# Altium PCB LPCB282R0.PcbDoc
Units mm, origin at the board's own origin, x right, y up, seen from the top; angles counter-clockwise.
Board outline 96 x 109 mm, 2 copper layers (Top Layer, Bottom Layer); 27 components, 11 nets, 50 pads, 6 vias.
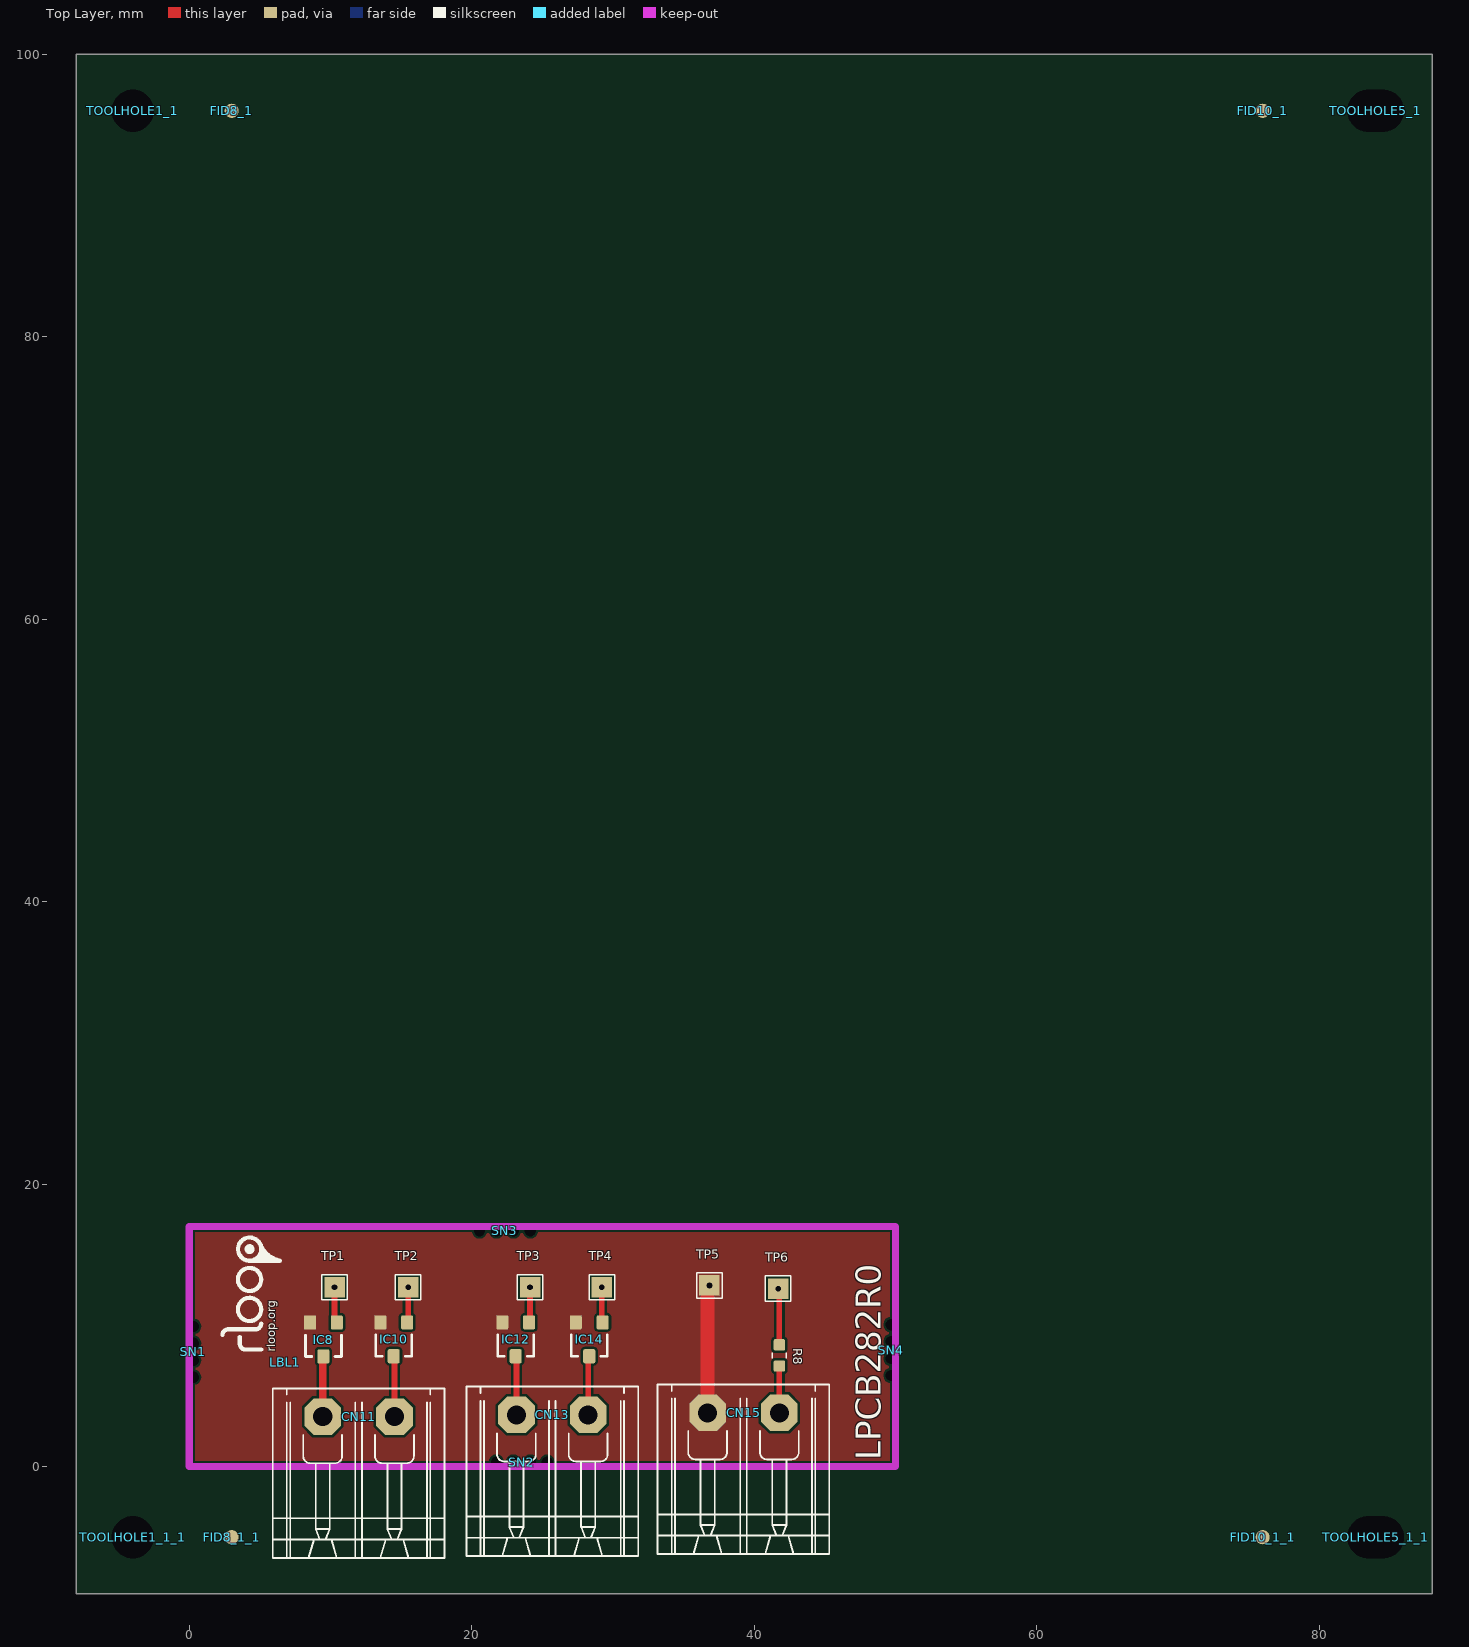
[diagram p0: Top Layer view]
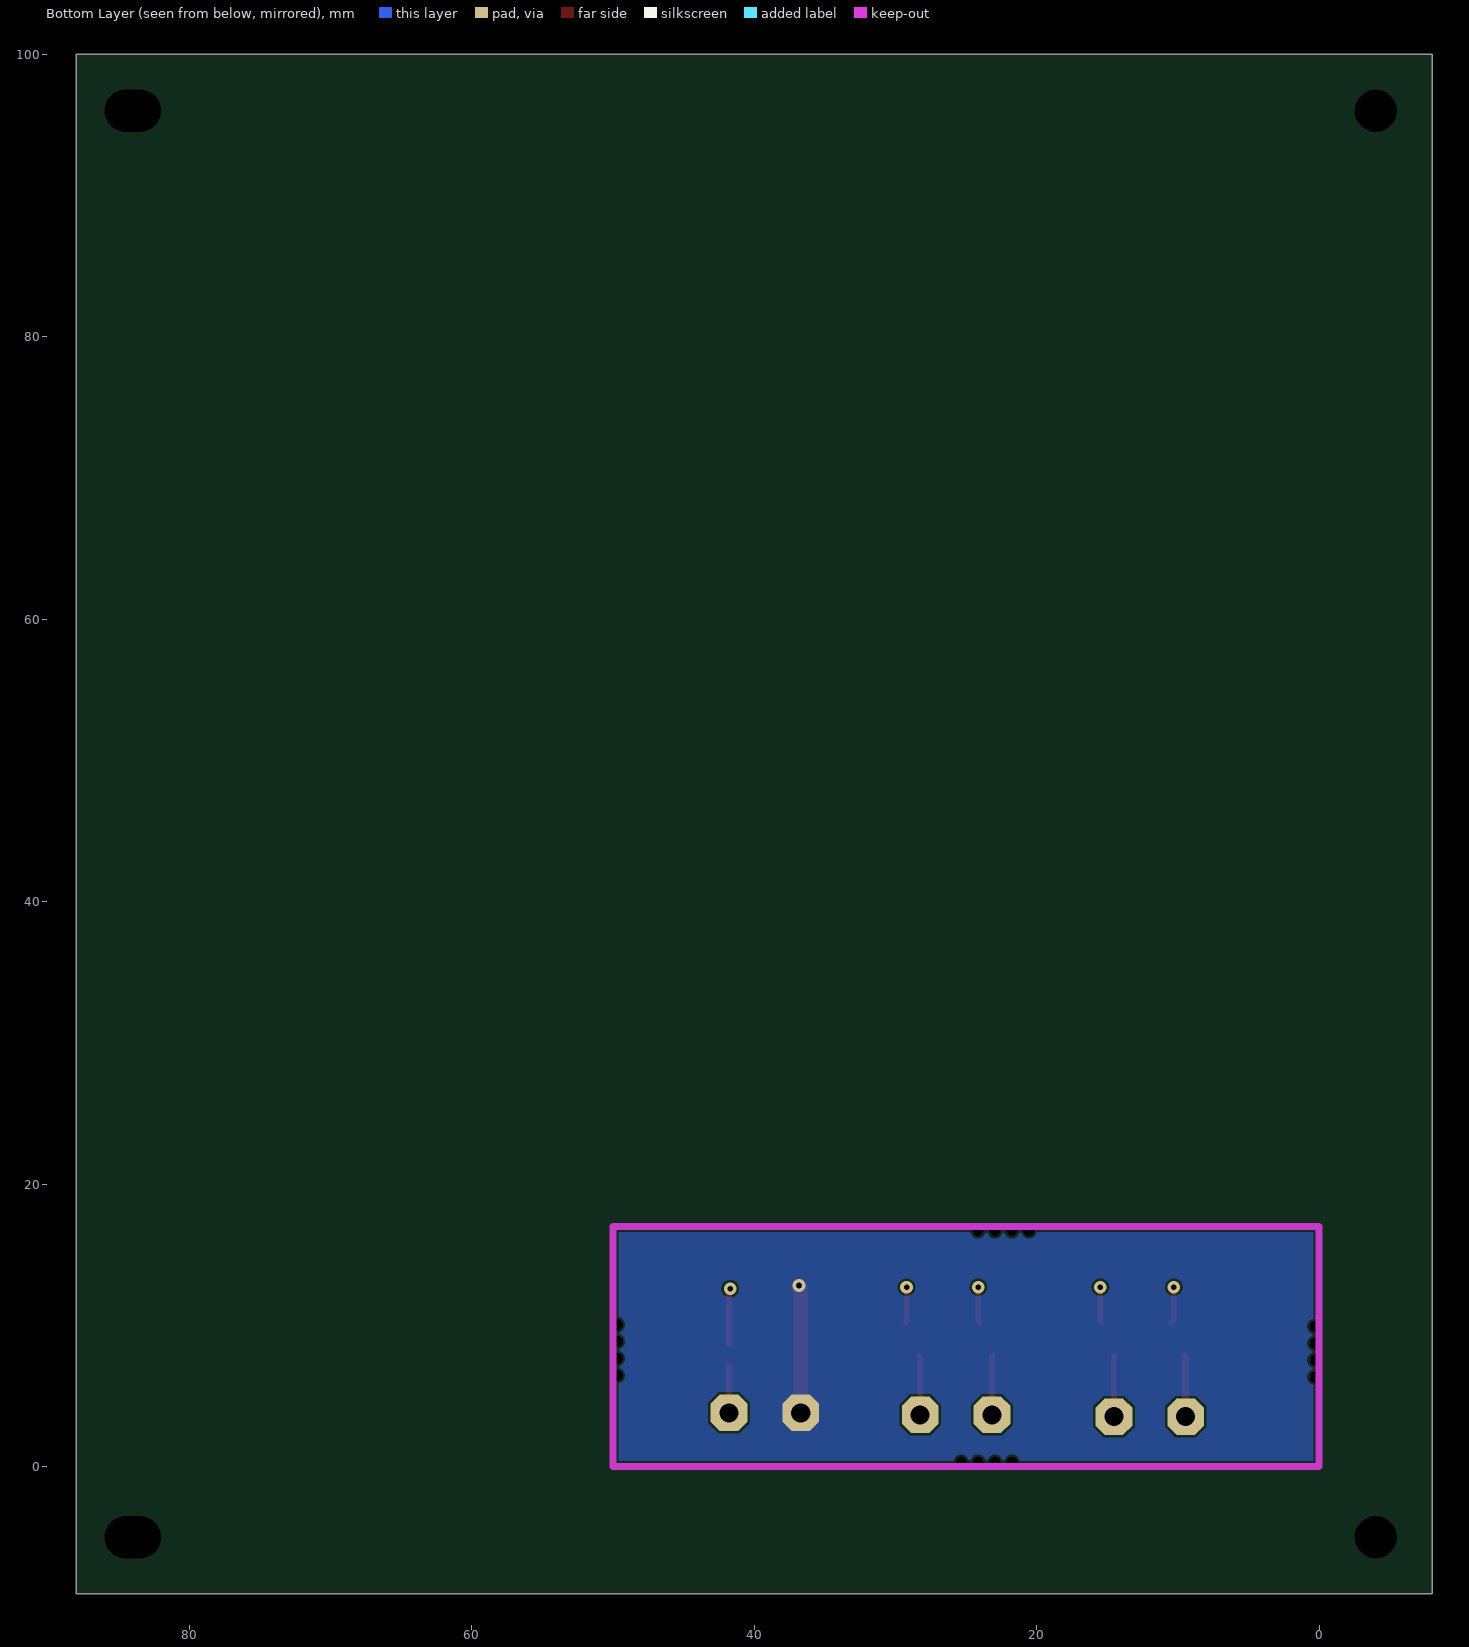
[diagram p1: Bottom Layer view, seen from below]

## Layer stack, top to bottom
Top Layer: signal copper 0.0356
Dielectric: dielectric 0.32, FR-4, Dk 4.8
Bottom Layer: signal copper 0.0356

## Board outline
-8,-9 -8,100 88,100 88,-9

## Design rules (kind name [scope] priority, off if disabled: settings)
Clearance [All] p1: gap=0.16
Height [All] p1 off: minheight=0 maxheight=25.4 prefheight=12.7
HoleSize [All] p1: absolutevalues=TRUE maxlimit=6 minlimit=0.025 maxpercent=80.000 minpercent=20.000
MinimumSolderMaskSliver [All] p1 off: minsoldermaskwidth=0.1
PlaneConnect PlaneConnect_1 [IsVia] p1: planeconnectstyle=Direct reliefexpansion=0.508 reliefentries=4 reliefconductorwidth=0.254 reliefairgap=0.254
PlaneConnect [All] p2: planeconnectstyle=Relief reliefexpansion=0.508 reliefentries=4 reliefconductorwidth=0.254 reliefairgap=0.254
PolygonConnect [IsVia] p1: connectstyle=Direct reliefconductorwidth=0.254 reliefentries=4 polygonreliefangle="90 Angle" airgapwidth=0.254
PolygonConnect PolygonConnect_1 [All] p2: connectstyle=Direct reliefconductorwidth=0.254 reliefentries=4 polygonreliefangle="90 Angle" airgapwidth=0.254
RoomDefinition "LPCB282 - TOP" [InComponentClass('LPCB282 - TOP')] p1: confinementstyle=ConfineIn formatcopy=TRUE lockcomponents=FALSE outline 169.165,61.386 336.932,61.386 336.932,80.69 169.165,80.69
RoutingVias [All] p1: holewidth=0.6 width=1.2 viastyle="Through Hole" minholewidth=0.3 minwidth=0.6 maxholewidth=1 maxwidth=2
SilkToSilkClearance [All] p1 off: silktosilkclearance=0.1
SilkToSolderMaskClearance [IsPad] p1 off: minsilkscreentomaskgap=0.1 clearancetoexposedcopper=TRUE
SolderMaskExpansion [All] p1: expansion=0.102
Width [All] p1: maxlimit=1 minlimit=0.16 preferedwidth=0.2
22 further rules are at their usual default settings.

## Classes and differential pairs
component class "LPCB282 - TOP": CN11 CN13 CN15 IC8 IC10 IC12 IC14 LBL1 R8 SN1 SN2 SN3 SN4 TP1 TP2 TP3 TP4 TP5 TP6

## Components (designator, comment, footprint, x,y, rotation, side; value= is the part's Value field where it differs from the comment)
CN11 "691 313 510 002" "691 313 510 002" 9.451,3.537 r0 top
CN13 "691 313 510 002" "691 313 510 002" 23.167,3.664 r0 top
CN15 "691 313 510 002" "691 313 510 002" 36.703,3.81 r0 top
FID8_1 "FIDUCIAL" LFP113__FIDUCIAL 3,96 r0 top
FID8_1_1 "FIDUCIAL" LFP113__FIDUCIAL 3,-5 r0 top
FID10_1 "FIDUCIAL" LFP113__FIDUCIAL 76,96 r0 top
FID10_1_1 "FIDUCIAL" LFP113__FIDUCIAL 76,-5 r0 top
IC8 "NUD3124LT1G" LFP021__SOT23 9.5,9 r180 top
IC10 "NUD3124LT1G" LFP021__SOT23 14.478,9.017 r180 top
IC12 "NUD3124LT1G" LFP021__SOT23 23.114,9.017 r180 top
IC14 "NUD3124LT1G" LFP021__SOT23 28.321,9.017 r180 top
LBL1 "RLOOP_LOGO" RLOOP_LOGO 6.8,7.4 r90 top
R8 "0R / 0.1W / SMD 0603" LFP020__CR1608-0603-IPC7351_B 41.783,7.874 r90 top
SN1 "PCB_SNAPOUT_0.3MM" PCB_SNAPOUT_0.3MM 0,8.128 r270 top
SN2 "PCB_SNAPOUT_0.3MM" PCB_SNAPOUT_0.3MM 23.548,0 r0 top
SN3 "PCB_SNAPOUT_0.3MM" PCB_SNAPOUT_0.3MM 22.352,17 r180 top
SN4 "PCB_SNAPOUT_0.3MM" PCB_SNAPOUT_0.3MM 50,8.255 r90 top
TOOLHOLE1_1 "Comment" TOOL-1#1 -4,96 r0 top
TOOLHOLE1_1_1 "Comment" TOOL-1#1 -4,-5 r0 top
TOOLHOLE5_1 "Comment" TOOL-1#2 84,96 r0 top
TOOLHOLE5_1_1 "Comment" TOOL-1#2 84,-5 r0 top
TP1 "SMD_TP_VIA" SMD-TP-VIA 10.287,12.7 r90 top
TP2 "SMD_TP_VIA" SMD-TP-VIA 15.494,12.7 r90 top
TP3 "SMD_TP_VIA" SMD-TP-VIA 24.13,12.7 r90 top
TP4 "SMD_TP_VIA" SMD-TP-VIA 29.21,12.7 r90 top
TP5 "SMD_TP_VIA" SMD-TP-VIA 36.83,12.827 r90 top
TP6 "SMD_TP_VIA" SMD-TP-VIA 41.7,12.6 r90 top

## Footprints (in the part's own frame and the unit in brackets; to place one, negate y for a bottom-side part, rotate by r counter-clockwise, add the part's x,y. Pads: shape width x height; smd on the part's side, far side on the other; paste and mask are expansions set on the pad)
"691 313 510 002" [mm] "Connector, Pluggable Terminal Block, 5.08mm, 2 Way, PTH"
  oct 2.6x2.6 hole 1.35: 1(0,0) 2(5.08,0)
  silkscreen extent -3.54,-10 8.62,2
LFP020__CR1608-0603-IPC7351_B [mm]
  rrect25% 0.8x0.8 smd: 1(-0.75,0) 2(0.75,0)
  silkscreen extent -0.2,-0.5 0.2,0.5
LFP021__SOT23 [mm] "SOT-23; 3 Leads; Body 3.0 x 2.5 mm, inc. leads (LxW max)"
  rrect25% 0.85x1 smd paste-0.05: 1(-0.95,-1.2) 2(0.95,-1.2) 3(0,1.2)
  silkscreen extent -1.27,-0.3 1.28,1.2
LFP113__FIDUCIAL [mm]
  round 1 smd paste-2 mask+1.5: 0(0,0)
PCB_SNAPOUT_0.3MM [mm]
  round 0.4 hole 0.8 unplated: 0(-1.8,0.3) 0(-0.6,0.3) 0(0.6,0.3) 0(1.8,0.3)
RLOOP_LOGO [mm]
  silkscreen extent 0.89,0.39 8.82,4.45
SMD-TP-VIA [mm]
  rect 1.45x1.45 smd paste-2: 1(0,0)
  silkscreen extent -0.9,-0.9 0.9,0.9
TOOL-1#1 [mm]
  round 2.54 hole 3 unplated: TOOL(0,0)
TOOL-1#2 [mm]
  round 0.076 hole 3 slot 4 at 0 deg unplated: TOOL1(0,0)

## Part data
CN11 CN13 CN15: "Connector, Pluggable Terminal Block, 5.08mm, 2 Way, PTH"
IC8 IC10 IC12 IC14: "IC, Relay Driver, 28V Industrial, SMD SOT23 [LIC292]"
R8: "Resistor, Ceramic Chip, 0R, 0.1W, SMD 0603 [LRE026]"
SN1 SN2 SN3 SN4: "PCB Snapout + 0.3mm"
TP1 TP2 TP3 TP4 TP5 TP6: "SMD Test Point With VIA"

## Via types
v1: diameter 0.9, hole 0.4, Top Layer to Bottom Layer, tented bottom, 6 vias

## Nets (pads, with @x,y where several pads share a name; then routed paths per layer and width w, separated by ;. In a path a pad name is that pad's centre, name@x,y a point inside that pad or via, vN(x,y) a via of type N, cw(c..) or ccw(c..) an arc to the next point about the centre after c; other vN are vias at no path point)
DGND: CN15.1 IC8.2 IC10.2 IC12.2 IC14.2 TP5.1 | length 9.1
  Top Layer w1: CN15.1 36.703,12.7 v1(36.83,12.827)
NetCN11_1: CN11.1 IC8.3 | length 4.3
  Top Layer w0.5: CN11.1 9.451,7.751 IC8.3
NetCN11_2: CN11.2 IC10.3 | length 4.3
  Top Layer w0.4: IC10.3 14.531,7.764 CN11.2
NetCN13_1: CN13.1 IC12.3 | length 4.2
  Top Layer w0.4: IC12.3 23.167,7.764 CN13.1
NetCN13_2: CN13.2 IC14.3 | length 4.2
  Top Layer w0.4: CN13.2 28.247,7.743 IC14.3
NetCN15_2: CN15.2 R8.1 | length 3.3
  Top Layer w0.4: CN15.2 R8.1
NetIC8_1: IC8.1 TP1.1 | length 2.6
  Top Layer w0.4: v1(10.287,12.7) 10.287,10.363 IC8.1
NetIC10_1: IC10.1 TP2.1 | length 2.5
  Top Layer w0.4: IC10.1 15.494,10.283 v1(15.494,12.7)
NetIC12_1: IC12.1 TP3.1 | length 2.5
  Top Layer w0.4: IC12.1 24.13,10.283 v1(24.13,12.7)
NetIC14_1: IC14.1 TP4.1 | length 2.5
  Top Layer w0.4: v1(29.21,12.7) 29.21,10.278 IC14.1
P24V: R8.2 TP6.1 | length 4
  Top Layer w0.4: v1(41.7,12.6) 41.783,12.517 R8.2
pads on no net: FID8_1.0 FID8_1_1.0 FID10_1.0 FID10_1_1.0 SN1.0 SN2.0 SN3.0 SN4.0 TOOLHOLE1_1.TOOL TOOLHOLE1_1_1.TOOL TOOLHOLE5_1.TOOL1 TOOLHOLE5_1_1.TOOL1

## Polygon pours and split planes (outlines as drawn)
DGND on Top Layer "Bottom Layer-No Net" (solid, remove dead copper, pour order 4): 0,0 0,17 50,17 50,0.2
DGND on Bottom Layer "Bottom Layer-No Net" (solid, remove dead copper, pour order 3): 0,0.1 0,17.1 50,17.1 50,0.3

## Keep-outs
Keep-Out Layer:
  lines w0.5: 0,0 50,0 50,17 0,17 0,0

## Silkscreen, mask and mechanical layers (free items; w line width, h text height)
Top Overlay:
  text "LPCB282R0" at 49.559,0.451 h3 r90
Top Paste:
  lines w1: -22.647,-15.577 177.353,-15.577 177.353,197.423 -22.647,197.423 -22.647,-15.577
Mechanical 1:
  lines w0.1: -8,-9 -8,100 88,100 88,-9 -8,-9
  lines w0.127: 0,0 0,17 50,17 50,0 0,0
Mechanical 3:
  lines w2.4: -1.2,6 -1.2,-1.2 20.644,-1.2 ; -1.2,10.8 -1.2,18.2 19.2,18.2 ; 25.2,18.2 51.2,18.2 51.2,11 ; 26.105,-1.2 51.2,-1.2 51.2,6.2
Mechanical 4:
  lines w0.203: 74.158,-44.783 112.099,-44.783 ; 112.059,-55.215 74.167,-55.223 74.167,-23.219 112.059,-23.215 ; 112.099,-55.222 112.099,-23.222
  lines w0.305: 112.751,-52.533 188.696,-52.536 ; 112.751,-48.533 188.696,-48.523 ; 112.751,-44.777 188.696,-44.793 ; 112.756,-44.77 188.701,-44.786 ; 112.756,-41.045 188.701,-41.048 ; 112.756,-37.045 188.701,-37.035 ; 112.756,-33.045 188.701,-33.047 ; 113.059,-29.215 188.559,-29.215 264.559,-29.215 ; 113.059,-28.715 188.559,-28.715 ; 125.349,-55.972 125.349,-23.222 ; 138.099,-55.972 138.099,-23.222 ; 150.849,-55.972 150.849,-23.222 ; 162.849,-55.972 162.849,-23.222 ; 177.215,-56.01 177.215,-23.244 ; 188.701,-48.544 264.698,-48.544 ; 188.726,-41.051 264.749,-41.051 ; 199.904,-56.037 199.904,-48.544 ; 218.724,-56.037 218.724,-48.544 ; 242.617,-56.09 242.617,-48.507 ; 242.701,-48.544 242.701,-41.051
  lines w0.508: -120.29,-16.032 -115.286,-16.032 ; -120.29,28.951 -115.286,28.951 ; -120.29,73.935 -115.286,73.935 ; -120.29,118.943 -115.286,118.943 ; -120.29,163.927 -115.286,163.927 ; -55.291,-61.041 -55.291,-56.037 ; -55.291,203.957 -55.291,208.961 ; -2.993,203.957 -2.993,208.961 ; 9.707,-61.041 9.707,-56.037 ; 55.343,203.969 55.343,208.973 ; 74.706,-61.041 74.706,-56.037 ; 112.809,-55.965 112.809,-23.215 264.559,-23.215 ; 139.704,-61.041 139.704,-56.037 ; 139.704,203.957 139.704,208.961 ; 188.697,-23.259 188.701,-56.037 ; 204.703,-61.041 204.703,-56.037 ; 204.703,203.957 204.703,208.961 ; 264.698,-16.032 269.702,-16.032 ; 264.698,28.951 269.702,28.951 ; 264.723,73.935 269.702,73.935 ; 264.723,118.943 269.702,118.943 ; 264.723,163.927 269.702,163.927 ; -120.29,-61.041 269.702,-61.041 269.702,208.961 -120.29,208.961 -120.29,-61.041 ; -115.286,-56.037 264.723,-56.037 264.723,203.957 -115.286,203.957 -115.286,-56.037
  text "1" at -85.289,204.948 h3
  text "2" at -37.994,204.948 h3
  text "3" at 39.705,204.948 h3
  text "4" at 103.713,204.948 h3
  text "5" at 172.724,204.948 h3
  text "6" at 233.71,204.948 h3
  text "A" at -118.283,182.951 h3
  text "A" at 265.714,182.951 h3
  text "B" at 265.714,139.924 h3
  text "B" at -118.283,138.933 h3
  text "C" at -118.283,93.95 h3
  text "C" at 265.714,93.95 h3
  text "D" at -118.283,48.966 h3
  text "D" at 265.714,48.966 h3
  text ".PCB_FILE_NAME_NO_PATH" at 272.543,32.303 h1.52 r90
  text "FILENAME:" at 272.416,21.635 h1.52 r90
  text "E" at -118.283,3.958 h3
  text "E" at 265.714,3.958 h3
  text "SIL3_PCBTEMPLATE_A3.PCB" at 272.67,-10.75 h1.52 r90
  text "TEMPLATE:" at 272.521,-22.72 h1.52 r90
  text "ISSUE" at 115.559,-26.715 h2.01
  text "DATE" at 128.059,-26.715 h2.01
  text "ECN" at 141.559,-26.715 h2.01
  text "DRAWN" at 152.559,-26.715 h2.01
  text "APP" at 179.559,-26.715 h2.01
  text "SIL3 Pty Ltd" at 75.693,-26.752 h2.54
  text "CHECKED" at 164.134,-26.8 h2.01
  text ".SIL3_PROJECT" at 205.106,-27.26 h1.78
  text "PROJECT:" at 190.305,-27.389 h2.01
  text "Factory 10" at 75.541,-30.308 h1.52
  text "R1.0" at 115.16,-32.124 h2.01
  text "PCB DESCRIPTION:" at 190.559,-32.215 h2.01
  text "01.08.12" at 126.259,-32.342 h2.01
  text "LJG" at 153.768,-32.378 h2.01
  text "9-13 Dingley Avenue" at 75.541,-33.229 h1.52
  text "Dandenong, VICTORIA, 3175" at 75.541,-35.769 h1.52
  text ".SIL3_PCB_DESC" at 190.501,-37.166 h2.5
  text "AUSTRALIA" at 75.541,-38.436 h1.52
  text "F" at -118.283,-41.051 h3
  text "F" at 265.714,-41.051 h3
  text "http://www.sil3.com.au" at 75.541,-41.103 h1.52
  text "LAYER" at 243.46,-43.897 h2.01
  text "ASSY. NUMBER:" at 190.501,-44.532 h2.01
  text ".SIL3_LDLREV" at 214.123,-46.056 h3
  text ".DATE_PRINT" at 272.559,-47.215 h1.52 r90
  text "GENERAL TOLERANCE:" at 81.66,-47.831 h1.52
  text "+" at 87.248,-50.498 h1.27
  text "CLASIFFICATION:" at 242.965,-50.883 h2.01
  text "0.2 mm" at 89.788,-51.006 h1.65
  text "SCALE:" at 189.516,-51.033 h2.01
  text "SHEET" at 206.71,-51.033 h2.01
  text "-" at 87.248,-51.641 h1.27
  text "UNLESS OTHERWISE SPECIFIED" at 77.85,-54.054 h1.52
  text "1 OF 1" at 205.36,-54.438 h2.01
  text "NTS" at 190.627,-54.591 h2.01
  text "UNCLASSIFIED" at 244.235,-54.693 h2.03
  text "A3" at 265.559,-59.715 h1.78
  text "1" at -85.289,-60.05 h3
  text "2" at -25.294,-60.05 h3
  text "3" at 39.705,-60.05 h3
  text "4" at 103.713,-60.05 h3
  text "5" at 172.724,-60.05 h3
  text "6" at 233.71,-60.05 h3
  text "PRINT DATE:" at 272.521,-60.66 h1.52 r90

## Text inside footprints (layer, text, board x,y; h text height)
LBL1: Top Overlay "rloop.org" at 6.3,8.15 h1 r90